# Altium PCB 电磁检测.PcbDoc
Units mm, origin at the board's own origin, x right, y up, seen from the top; angles counter-clockwise.
Board outline 44 x 26 mm, 2 copper layers (Top Layer, Bottom Layer); 51 components, 29 nets, 122 pads, 2 vias.
Unrouted connection lines stored in the file: 1.
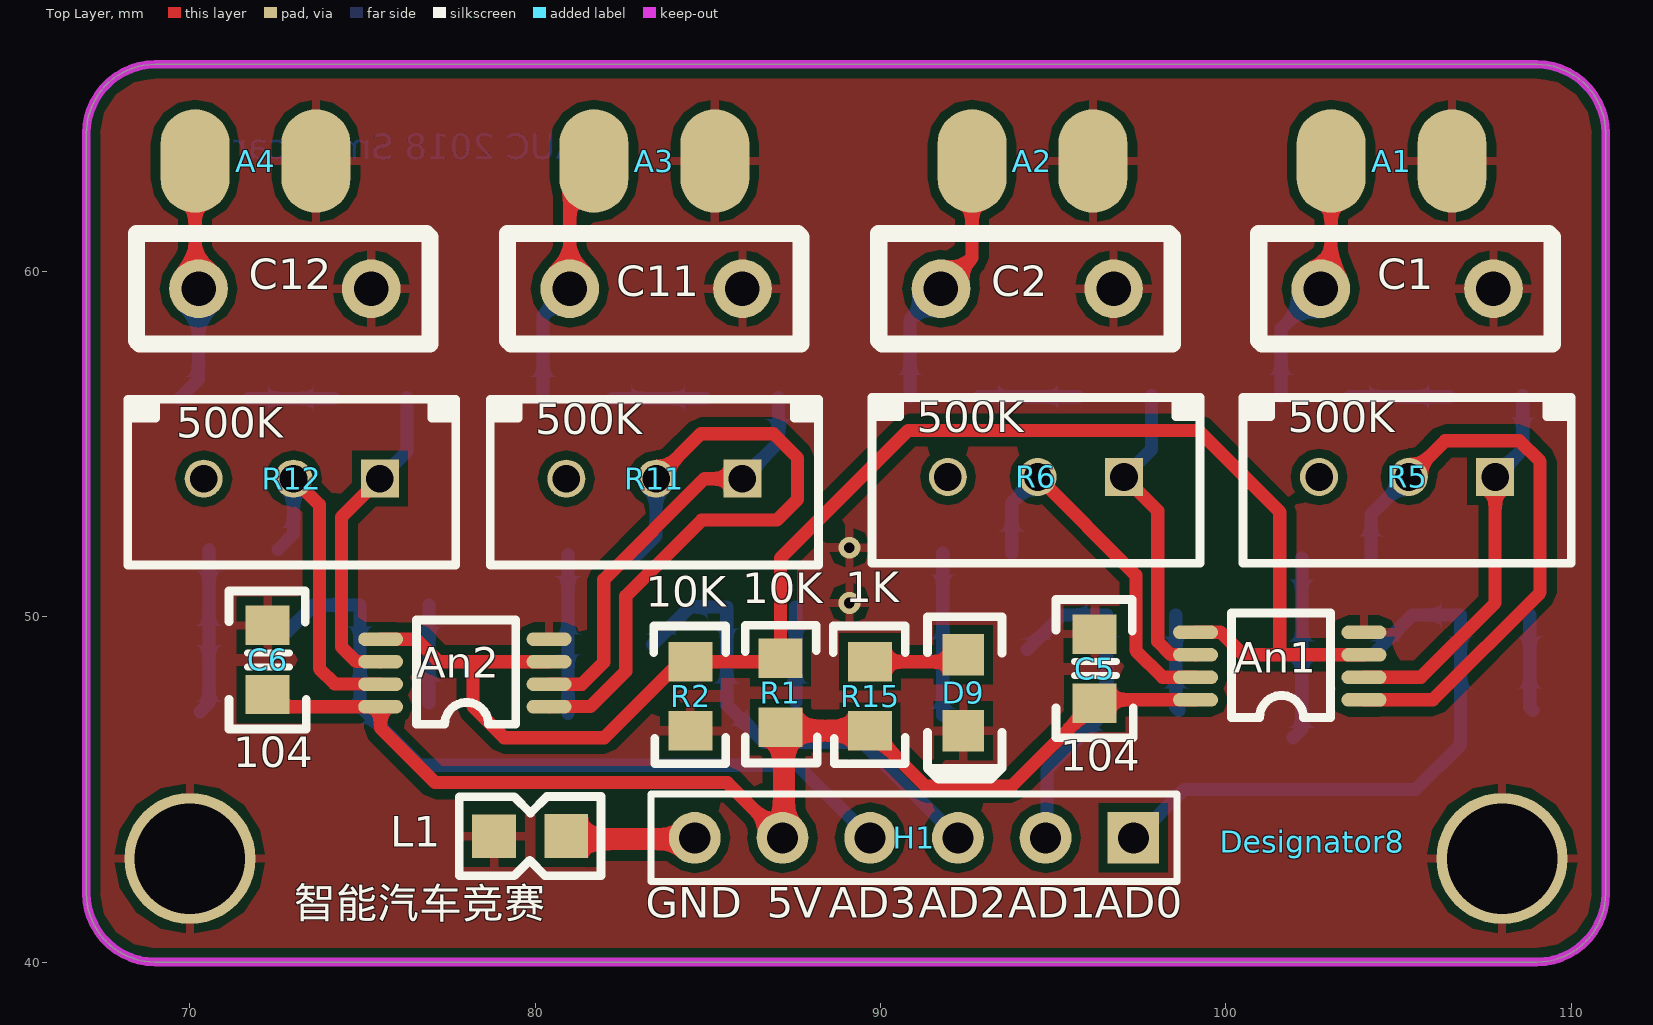
[diagram p0: Top Layer view]
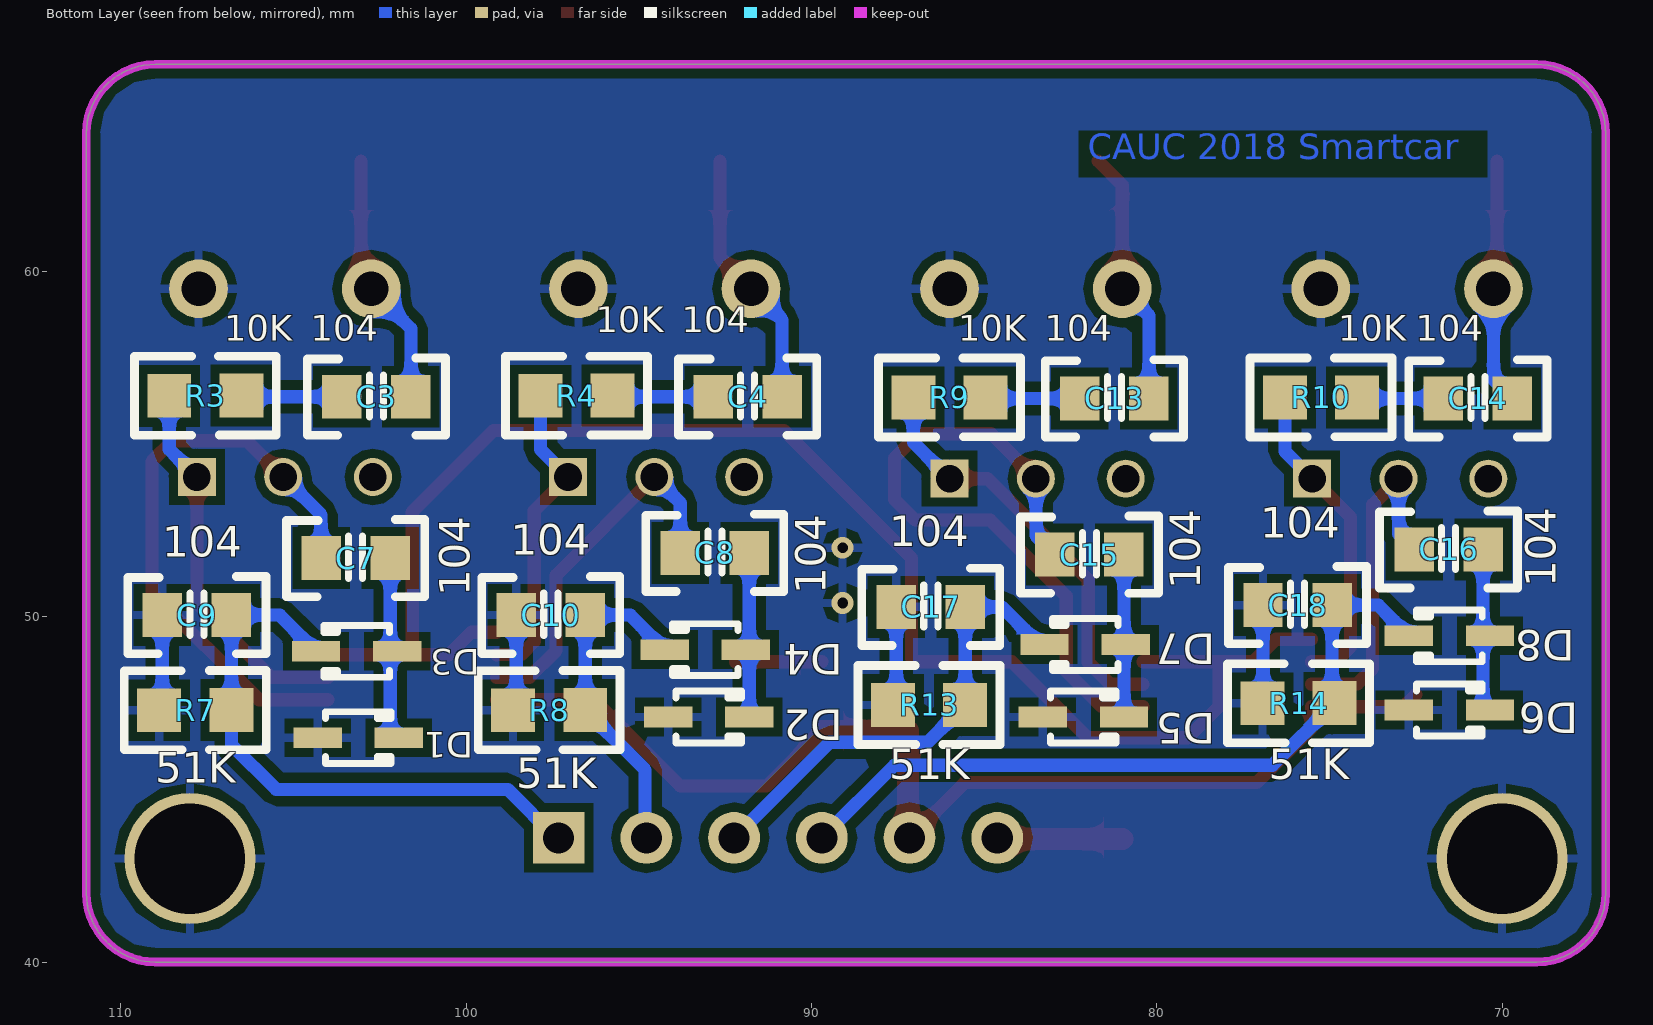
[diagram p1: Bottom Layer view, seen from below]
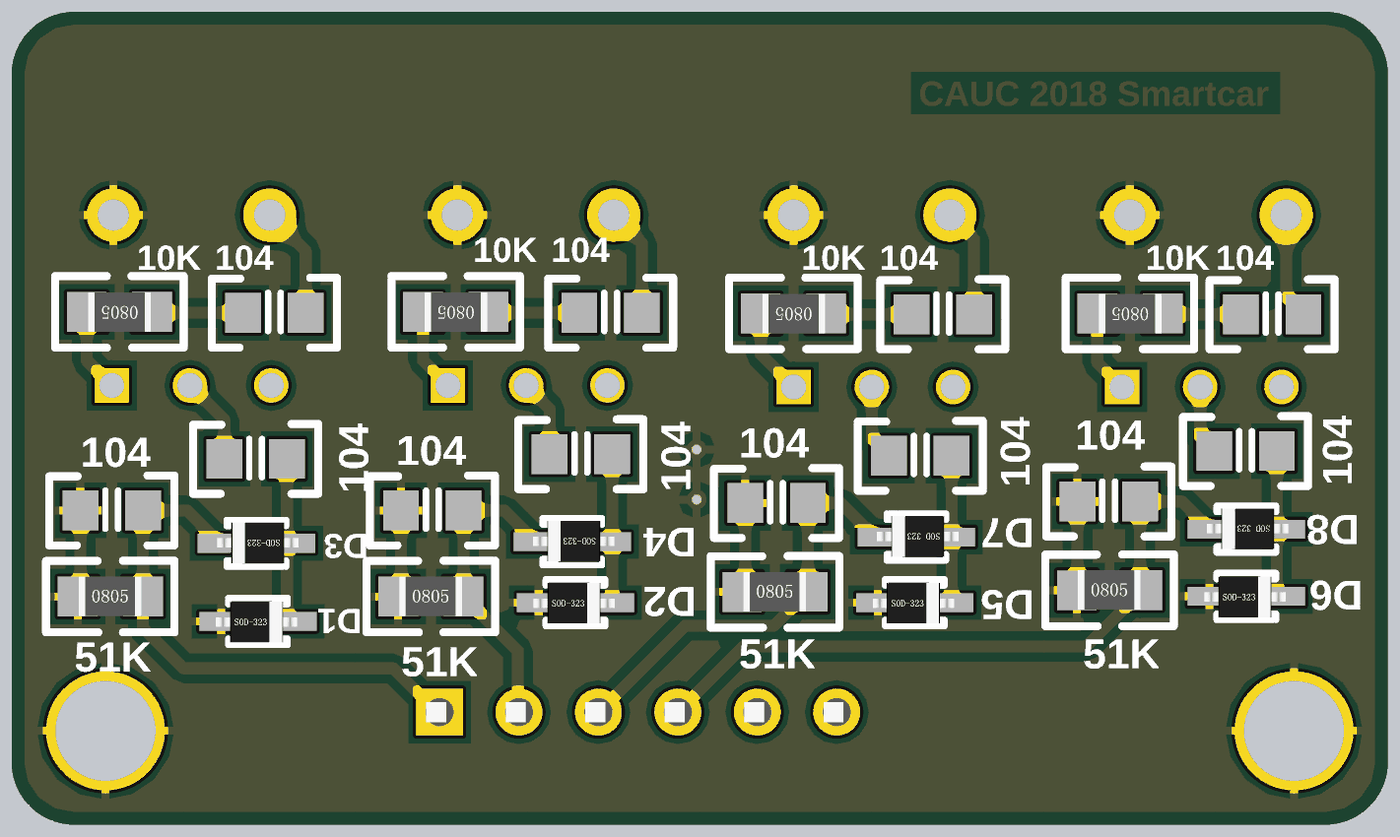
[diagram p2: 3D render of the assembled board from below, using the file's embedded part models]

## Layer stack, top to bottom
Top Solder: solder mask 0.0102, Solder Resist, Dk 3.5
Top Layer: signal copper 0.0356
Dielectric 1: dielectric 0.32, FR-4, Dk 4.8
Bottom Layer: signal copper 0.0356
Bottom Solder: solder mask 0.0102, Solder Resist, Dk 3.5

## Board outline
67,42 ccw(c69,42) 69,40 109,40 ccw(c109,42) 111,42 111,64 ccw(c109,64) 109,66 69,66 ccw(c69,64) 67,64

## Design rules (kind name [scope] priority, off if disabled: settings)
Clearance [All] p1: gap=0.254 ignorepadtopadclearanceinfootprint=FALSE except(0: Arc-Hole Track-Hole SMDPad-Hole THPad-Hole Via-Hole Fill-Hole Poly-Hole Region-Hole Text-Hole; 0.152: SMDPad-SMDPad)
PolygonConnect [All] p1: connectstyle=Relief reliefconductorwidth=0.254 reliefentries=4 polygonreliefangle="90 Angle" airgapwidth=0.254
RoutingVias [All] p1: holewidth=0.711 width=1.27 viastyle="Through Hole" minholewidth=0.711 minwidth=1.27 maxholewidth=0.711 maxwidth=1.27
SolderMaskExpansion [All] p1: expansion=0.102
Width [All] p1: maxlimit=0.762 minlimit=0.254 preferedwidth=0.254
30 further rules are at their usual default settings.

## Components (designator, comment, footprint, x,y, rotation, side; value= is the part's Value field where it differs from the comment)
A1 "Senor" Senor 105.05,63.2 r0 top
A2 "Senor" Senor 94.65,63.2 r0 top
A3 "Senor" Senor 83.7,63.2 r0 top
A4 "Senor" Senor 72.15,63.2 r0 top
An1 "AD8032AR" MSOP8 104,47.596 r180 top
An2 "AD8032AR" MSOP8 80.4,47.396 r180 top
C1 "6.8nF" "CAP 6.8nf" 107.75,59.5 r180 top
C2 "6.8nF" "cap 6.8nf" 96.75,59.5 r180 top
C3 "104" "C 0805" 102.6,56.375 r180 bottom
C4 "104" "C 0805" 91.85,56.375 r180 bottom
C5 "104" "C 0805" 96.2,48.5 r270 top
C6 "104" "C 0805" 72.25,48.75 r270 top
C7 "104" "C 0805" 103.2,51.7 r180 bottom
C8 "104" "C 0805" 92.8,51.85 r180 bottom
C9 "104" "C 0805" 107.8,50.05 r180 bottom
C10 "104" "C 0805" 97.55,50.05 r180 bottom
C11 "6.8nF" "CAP 6.8nf" 86,59.5 r180 top
C12 "6.8nF" "CAP 6.8nf" 75.25,59.5 r180 top
C13 "104" "C 0805" 81.229,56.325 r180 bottom
C14 "104" "C 0805" 70.7,56.325 r180 bottom
C15 "104" "C 0805" 81.95,51.8 r180 bottom
C16 "104" "C 0805" 71.55,51.95 r180 bottom
C17 "104" "C 0805" 86.545,50.288 r180 bottom
C18 "104" "C 0805" 75.924,50.338 r180 bottom
D1 "?" SOD323 104.3,46.5 r180 bottom
D2 "?" SOD323 94.15,47.1 r180 bottom
D3 "?" SOD323 102,49 r0 bottom
D4 "?" SOD323 91.9,49.05 r0 bottom
D5 "?" SOD323 83.3,47.1 r180 bottom
D6 "?" SOD323 72.7,47.3 r180 bottom
D7 "?" SOD323 80.9,49.2 r0 bottom
D8 "?" SOD323 70.35,49.45 r0 bottom
D9 "LED" 0805LED 92.5,47.8 r270 top
Designator8 "Comment" 505LOGO 102.5,43.5 r0 top
H1 "H?" HDR1X6 97.32,43.6 r180 top
L1 "0R" L0805 78.81,43.645 r0 top
R1 "10K" "R 0805" 87.1,47.8 r270 top
R2 "10K" "R 0805" 84.5,47.7 r90 top
R3 "10K" R0805 106.51,56.405 r0 bottom
R4 "10K" R0805 95.76,56.405 r0 bottom
R5 "500K" 精密滑变 107.8,54.05 r180 top
R6 "500K" 精密滑变 97.05,54.05 r180 top
R7 "51K" R0805 108.89,47.295 r180 bottom
R8 "51K" R0805 98.64,47.295 r180 bottom
R9 "10K" R0805 84.96,56.355 r0 bottom
R10 "10K" R0805 74.2,56.355 r0 bottom
R11 "500K" 精密滑变 86,54 r180 top
R12 "500K" 精密滑变 75.5,54 r180 top
R13 "51K" R0805 87.64,47.445 r180 bottom
R14 "51K" R0805 76.94,47.495 r180 bottom
R15 "1K" "R 0805" 89.7,47.7 r90 top

## Footprints (in the part's own frame and the unit in brackets; to place one, negate y for a bottom-side part, rotate by r counter-clockwise, add the part's x,y. Pads: shape width x height; smd on the part's side, far side on the other; paste and mask are expansions set on the pad)
505LOGO [mm]
0805LED [mm]
  rect 1.2x1.2 smd: 1(-1.1,-0.1) 2(1.1,-0.1)
  silkscreen extent -2.2,-1.14 2.5,1.02, body extent -1,-0.7 1,0.5, height 0.6
"C 0805" [mm]
  rect 1.143x1.27 smd: 1(-1,0) 2(1,0)
  silkscreen extent -2,-1.12 2,1.12, body extent -1,-0.5 1,0.5, height 0.51
"CAP 6.8nf" [mm]
  round 1.7 hole 1: 1(0,0) 2(5,0)
  silkscreen extent -1.7,-1.6 6.8,1.6, body extent -1.2,-1.3 6.3,1.3, height 10
"cap 6.8nf" [mm]
  round 1.7 hole 1: 1(0,0) 2(5,0)
  silkscreen extent -1.7,-1.6 6.8,1.6, body extent -1.2,-1.3 6.3,1.3, height 10
HDR1X6 [mm] "Connector; Header; 6 Position"
  rect 1.5x1.5 hole 0.9: 1(0,0)
  round 1.5 hole 0.9: 2(2.54,0) 3(5.08,0) 4(7.62,0) 5(10.16,0) 6(12.7,0)
  silkscreen extent -1.27,-1.27 13.97,1.27, body extent -1.37,-1.27 13.87,1.27, height 8.54
L0805 [mm] "1/8W"
  rect 1.27x1.27 smd: 1(0,0) 2(2.09,0.005)
  silkscreen extent -1.01,-1.14 3.1,1.15, body extent 0.04,-0.62 2.04,0.64, height 0.55
MSOP8 [mm]
  oval 1.3x0.4 smd: 1(0,0) 2(0,-0.652) 3(0,-1.304) 4(0,-1.956) 5(4.877,-1.956) 6(4.877,-1.304) 7(4.877,-0.652) 8(4.877,0)
  silkscreen extent 0.97,-2.51 3.84,0.51, body extent -0.03,-2.54 4.91,0.56, height 1.05
R0805 [mm] "1/8W"
  rect 1.27x1.27 smd: 1(0,0) 2(2.09,0.005)
  silkscreen extent -1.01,-1.14 3.1,1.15, body extent 0.04,-0.62 2.04,0.64, height 0.55
"R 0805" [mm]
  rect 1.143x1.27 smd: 1(-1,0) 2(1,0)
  silkscreen extent -1.96,-1.02 2.03,1.07, body extent -1,-0.63 1,0.63, height 0.55
Senor [mm]
  oval 2x3 smd: 1(-2,0) 2(1.5,0)
SOD323 [mm] "0805"
  rect 1.4x0.6 smd: 1(0,0) 2(2.35,0)
  silkscreen extent 0.22,-0.75 2.12,0.75, body extent -0.17,-0.67 2.43,0.63, height 1
精密滑变 [mm]
  rect 1.1x1.1 hole 0.8: 1(0,0)
  round 1.1 hole 0.8: 2(2.5,0) 3(5.1,0)
  silkscreen extent -2.2,-2.3 7.3,2.5, body extent -2.25,-2.25 7.25,2.5, height 11.51

## Part data
C1 C2 C3 C4 C5 C6 C7 C8 C9 C10 C11 C12 C13 C14 C15 C16 C17 C18: library part CAP
D1 D2 D3 D4 D5 D6 D7 D8: library part Diode
H1: library part header6
L1: library part Inductance
R1 R2 R3 R4 R7 R8 R9 R10 R13 R14 R15: library part RES
R5 R6 R11 R12: library part RES_ADJ

## Free pads (board coordinates)
  round 3.8 hole 3.2: 0(70,43) 0(108,43)

## Via types
v1: diameter 0.635, hole 0.305, Top Layer to Bottom Layer, tented both sides, 2 vias

## Nets (pads, with @x,y where several pads share a name; then routed paths per layer and width w, separated by ;. In a path a pad name is that pad's centre, name@x,y a point inside that pad or via, vN(x,y) a via of type N, cw(c..) or ccw(c..) an arc to the next point about the centre after c; other vN are vias at no path point)
ADC0: C9.2 D3.2 H1.1 R7.2 | length 17.2
  Bottom Layer w0.381: H1.1@97.356,43.56 98.796,45 105.5,45 106.8,46.3 R7.2 C9.2 105.4,50.05 D3.2
ADC1: C10.2 D4.2 H1.2 R8.2 | length 9.9
  Bottom Layer w0.381: D4.2 95.25,50.05 C10.2 R8.2 94.816,45.566 H1.2@94.816,43.56
ADC2: C17.2 D7.2 H1.3 R13.2 | length 13.7
  Bottom Layer w0.381: D7.2@83.4,49.2 84.488,50.288 C17.2 85.545,47.455 R13.2 86.635,46.365 89.475,46.365 H1.3
ADC3: C18.2 D8.2 H1.4 R14.2 | length 21.9
  Bottom Layer w0.381: D8.2 73.588,50.338 C18.2 74.924,47.574 R14.2 76.65,45.7 87.596,45.7 89.696,43.6 H1.4
AGND: A1.2 A2.2 A3.2 A4.2 An1.4 An2.4 C1.1 C2.1 C5.1 C6.1 C9.1 C10.1 C11.1 C12.1 C17.1 C18.1 D1.1 D2.1 D5.1 D6.1 D9.2 L1.1 pad.0 R2.1 R7.1 R8.1 R13.1 R14.1 | length 11.2
  Bottom Layer w0.381: R14.1@76.924,47.511 C18.1 ; R13.1@87.545,47.54 C17.1 ; C10.1 98.55,47.385 R8.1 ; C9.1 108.8,47.385 R7.1
  other v1: 89.1,50.4 89.1,52
AVCC2.5V: An1.3 An1.5 An2.3 An2.5 R1.1 R2.2 | length 45.7
  Top Layer w0.381: An2.5 76.548,49.352 77.2,48.7 78.2,48.7 ; An2.3 78.2,48.7 ; R1.1@87,48.7 R2.2 84.2,48.7 82,46.5 79.1,46.5 78.2,47.4 78.2,48.7 ; R1.1 87.1,51.7 90.8,55.4 99.2,55.4 101.562,53.038 101.562,48.9 ; An1.5 99.848,49.552 100.5,48.9 101.562,48.9 ; An1.3 101.562,48.9
AVCC5V: An1.8 An2.8 C5.2 C6.2 H1.5 R1.2 R15.1 | length 33.5
  Top Layer w0.381: C6.2@72.5,47.75 72.75,47.5 72.75,47.396 An2.8 75.523,46.777 77.1,45.2 85.564,45.2 H1.5@87.2,43.564 ; R15.1 91.3,45.1 93.8,45.1 C5.2 ; C5.2@96.296,47.596 An1.8
  Top Layer w0.635: H1.5@87.2,43.564 87.2,46.7 R15.1
NetA1_1: A1.1 C1.2 C3.2 | length 7.4
  Top Layer w0.381: C1.2 103.05,59.8 A1.1
  Bottom Layer w0.381: C3.2 101.6,58.35 C1.2
NetA2_1: A2.1 C2.2 C4.2 | length 7.6
  Top Layer w0.381: C2.2 92.65,60.4 A2.1
  Bottom Layer w0.381: C4.2 90.85,58.6 C2.2
NetA3_1: A3.1 C11.2 C13.2 | length 7.5
  Top Layer w0.381: C11.2 81,62.5 A3.1
  Bottom Layer w0.381: C13.2 80.229,58.729 C11.2
NetA4_1: A4.1 C12.2 C14.2 | length 7
  Top Layer w0.381: C12.2@70.15,59.6 A4.1
  Bottom Layer w0.381: C14.2 70.25,56.875 C12.2
NetAn1_1: An1.1 C7.1 R5.2 | length 17.5
  Top Layer w0.381: An1.1 105.996,47.596 109.1,50.7 109.1,54.5 108.5,55.1 106.35,55.1 R5.2
  Bottom Layer w0.381: C7.1 104.2,52.95 R5.2
NetAn1_2: An1.2 R3.2 R5.1 | length 11
  Top Layer w0.381: An1.2 105.648,48.248 107.8,50.4 R5.1
  Bottom Layer w0.381: R5.1 108.6,54.85 R3.2
NetAn1_6: An1.6 R4.2 R6.1 | length 6.4
  Top Layer w0.381: R6.1 98.029,53.071 98.029,49.285 98.406,48.907 99.116,48.907 An1.6
NetAn1_7: An1.7 C8.1 R6.2 | length 10.8
  Top Layer w0.381: R6.2 97.394,51.206 97.394,49.022 98.168,48.248 An1.7
  Bottom Layer w0.381: C8.1 93.8,53.3 R6.2
NetAn2_1: An2.1 C15.1 R11.2 | length 19.5
  Top Layer w0.381: An2.1 80.407,47.404 81.602,47.404 82.621,48.422 82.621,50.6 84.821,52.8 87,52.8 87.6,53.4 87.6,54.6 86.9,55.3 84.8,55.3 R11.2
  Bottom Layer w0.381: C15.1 83.5,52.35 R11.2
NetAn2_2: An2.2 R9.2 R11.1 | length 12.3
  Top Layer w0.381: An2.2 81.348,48.048 81.986,48.685 81.986,51.079 84.9,53.994 84.9,54 R11.1
  Bottom Layer w0.381: R11.1 87.05,55.05 R9.2
NetAn2_6: An2.6 R10.2 R12.1 | length 9.3
  Top Layer w0.381: R12.1 74.385,52.885 74.385,49.129 74.806,48.707 75.516,48.707 An2.6
  Bottom Layer w0.381: R12.1 76.29,54.79 R10.2
NetAn2_7: An2.7 C16.1 R12.2 | length 10
  Top Layer w0.381: R12.2 73.75,53.25 73.75,48.5 74.194,48.055 75.516,48.055 An2.7
  Bottom Layer w0.381: C16.1 73,52.4 R12.2
NetC3_1: C3.1 R3.1 | length 2.9
  Bottom Layer w0.381: C3.1 R3.1@106.479,56.375
NetC4_1: C4.1 R4.1 | length 2.9
  Bottom Layer w0.381: C4.1 R4.1@95.729,56.375
NetC7_2: C7.2 D1.2 D3.1 | length 5.3
  Bottom Layer w0.381: D1.2 102.2,46.75 C7.2
NetC8_2: C8.2 D2.2 D4.1 | length 4.7
  Bottom Layer w0.381: D2.2@91.8,47.15 C8.2
NetC13_1: C13.1 R9.1 | length 2.7
  Bottom Layer w0.381: C13.1 R9.1@84.929,56.325
NetC14_1: C14.1 R10.1 | length 2.5
  Bottom Layer w0.381: C14.1 R10.1@74.17,56.325
NetC15_2: C15.2 D5.2 D7.1 | length 4.6
  Bottom Layer w0.381: D5.2@80.95,47.2 C15.2
NetC16_2: C16.2 D6.2 D8.1 | length 4.8
  Bottom Layer w0.381: D6.2@70.3,47.25 70.55,47.5 C16.2
NetD9_1: D9.1 R15.2 | length 2.5
  Top Layer w0.381: R15.2 D9.1@92.2,48.7
SGND: H1.6 L1.2 | length 3.7
  Top Layer w0.635: L1.2@80.99,43.56 H1.6@84.656,43.56
pads on no net: R5.3 R6.3 R11.3 R12.3
copper on no net: | length 2.7
  Bottom Layer w0.381: 97.05,54.05 97.85,54.85 97.85,56.4

## Polygon pours and split planes (outlines as drawn)
AGND on Bottom Layer "AGND_L02_P007" (solid, remove dead copper, pour order 7): 67,66 67,39.9 67.1,40 111,40 111,65.9 111.1,66
AGND on Top Layer "AGND_L01_P009" (solid, remove dead copper, pour order 9): 67,66 67,40 111,40 111,66

## Keep-outs
Keep-Out Layer:
  the board outline again, w0.254

## Other copper
Bottom Layer:
  text "CAUC 2018 Smartcar" at 82,63 h1.27

## Silkscreen, mask and mechanical layers (free items; w line width, h text height)
Top Overlay:
  text "智能汽车竞赛" at 73,41 h1.52
  text "GND" at 83.2,41 h1.52
  text "5V" at 86.7,41 h1.52
  text "AD3" at 88.5,41 h1.52
  text "AD2" at 91.1,41 h1.52
  text "AD1" at 93.7,41 h1.52
  text "AD0" at 96.2,41 h1.52